# Altium PCB Big Coil Gate Drive PCBA.PcbDoc
Units mm, origin at the board's own origin, x right, y up, seen from the top; angles counter-clockwise.
Board outline 45.67 x 33.06 mm, 2 copper layers (Top Layer, Bottom Layer), stack 1.571 mm thick; 21 components, 10 nets, 60 pads, 0 vias.
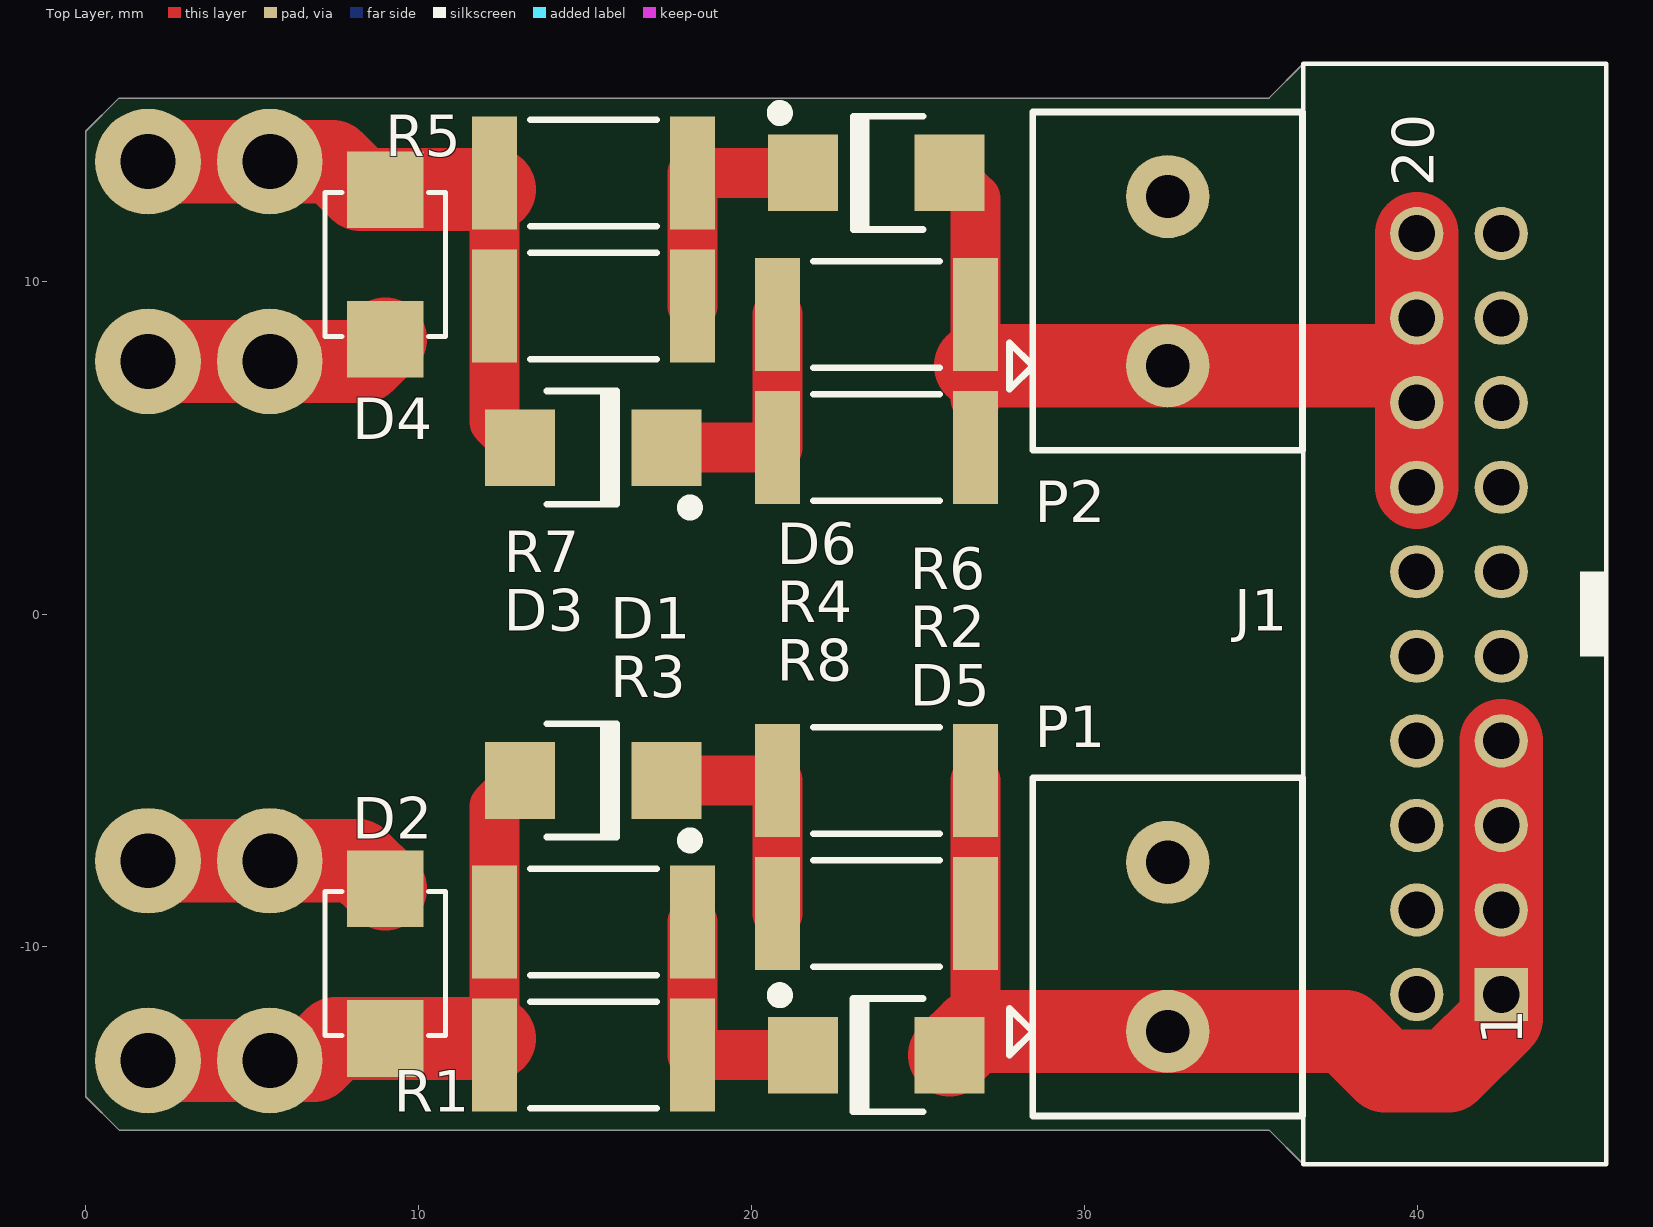
[diagram p0: Top Layer view]
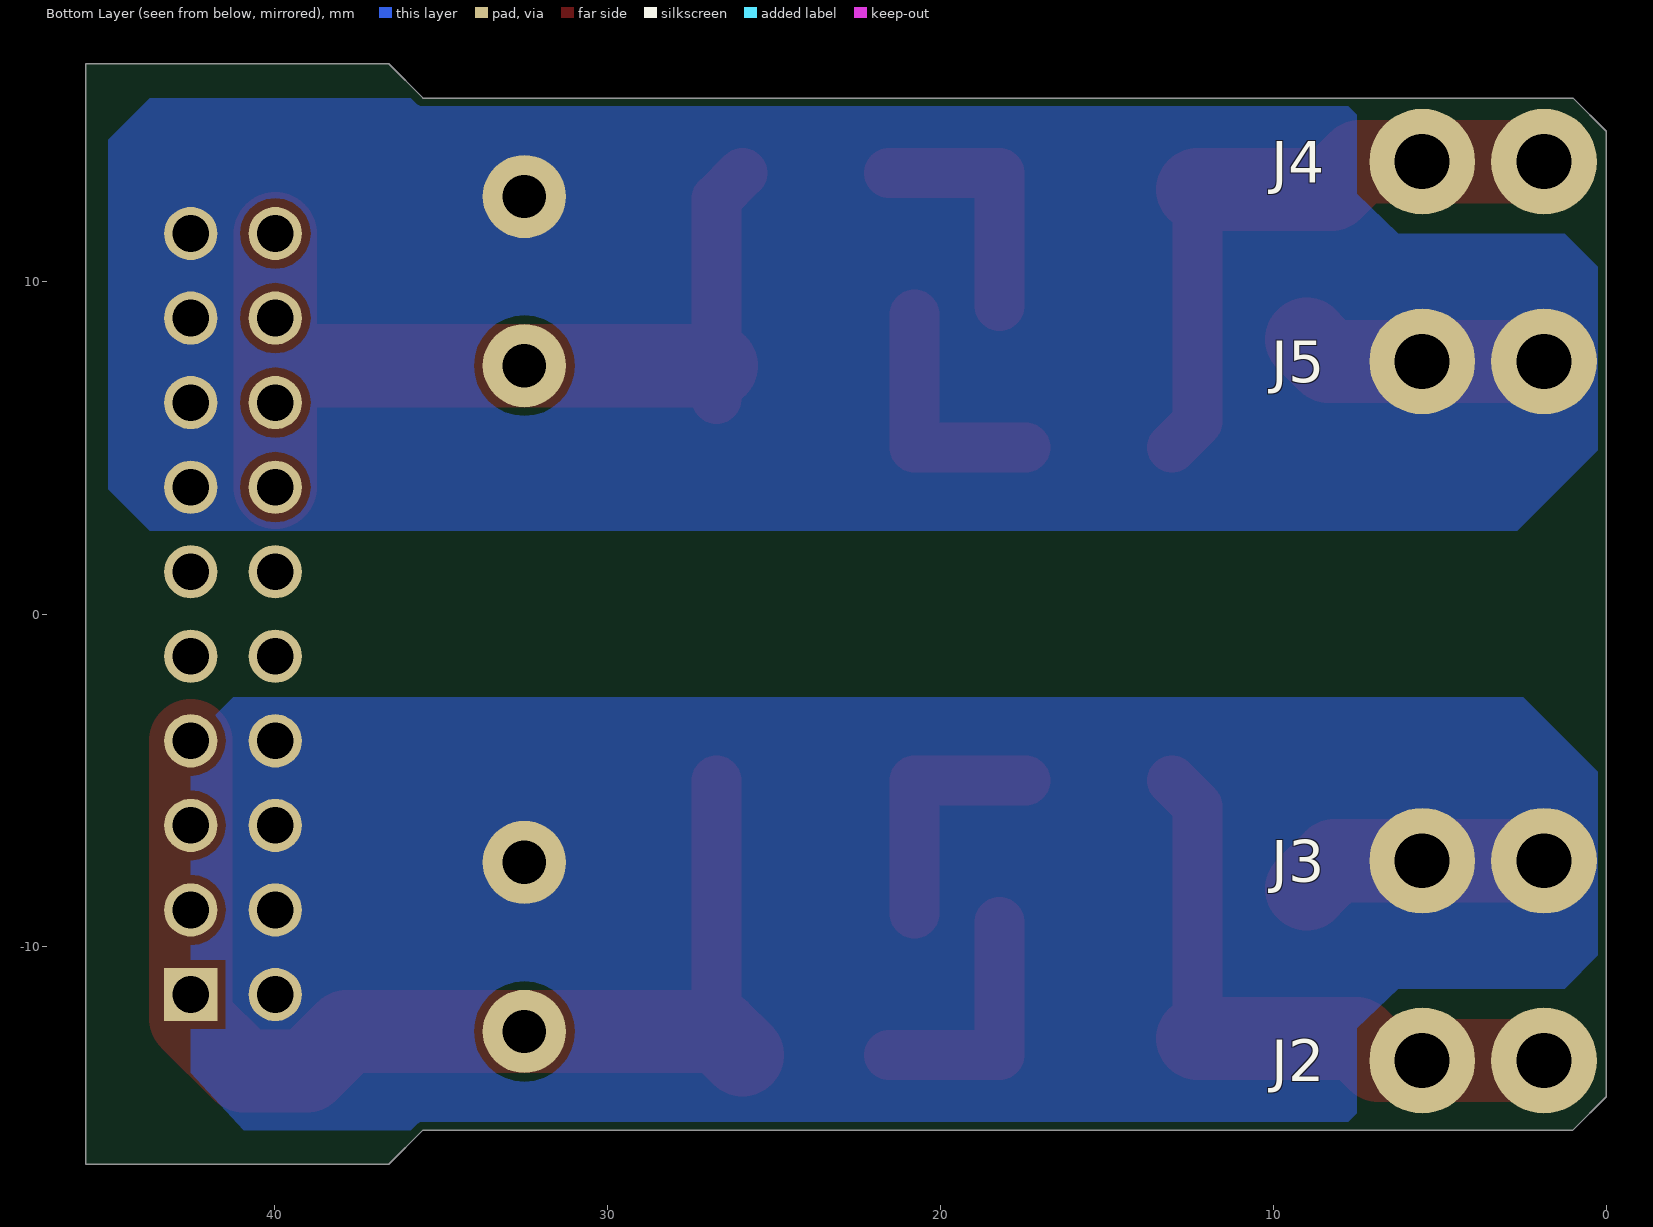
[diagram p1: Bottom Layer view, seen from below]
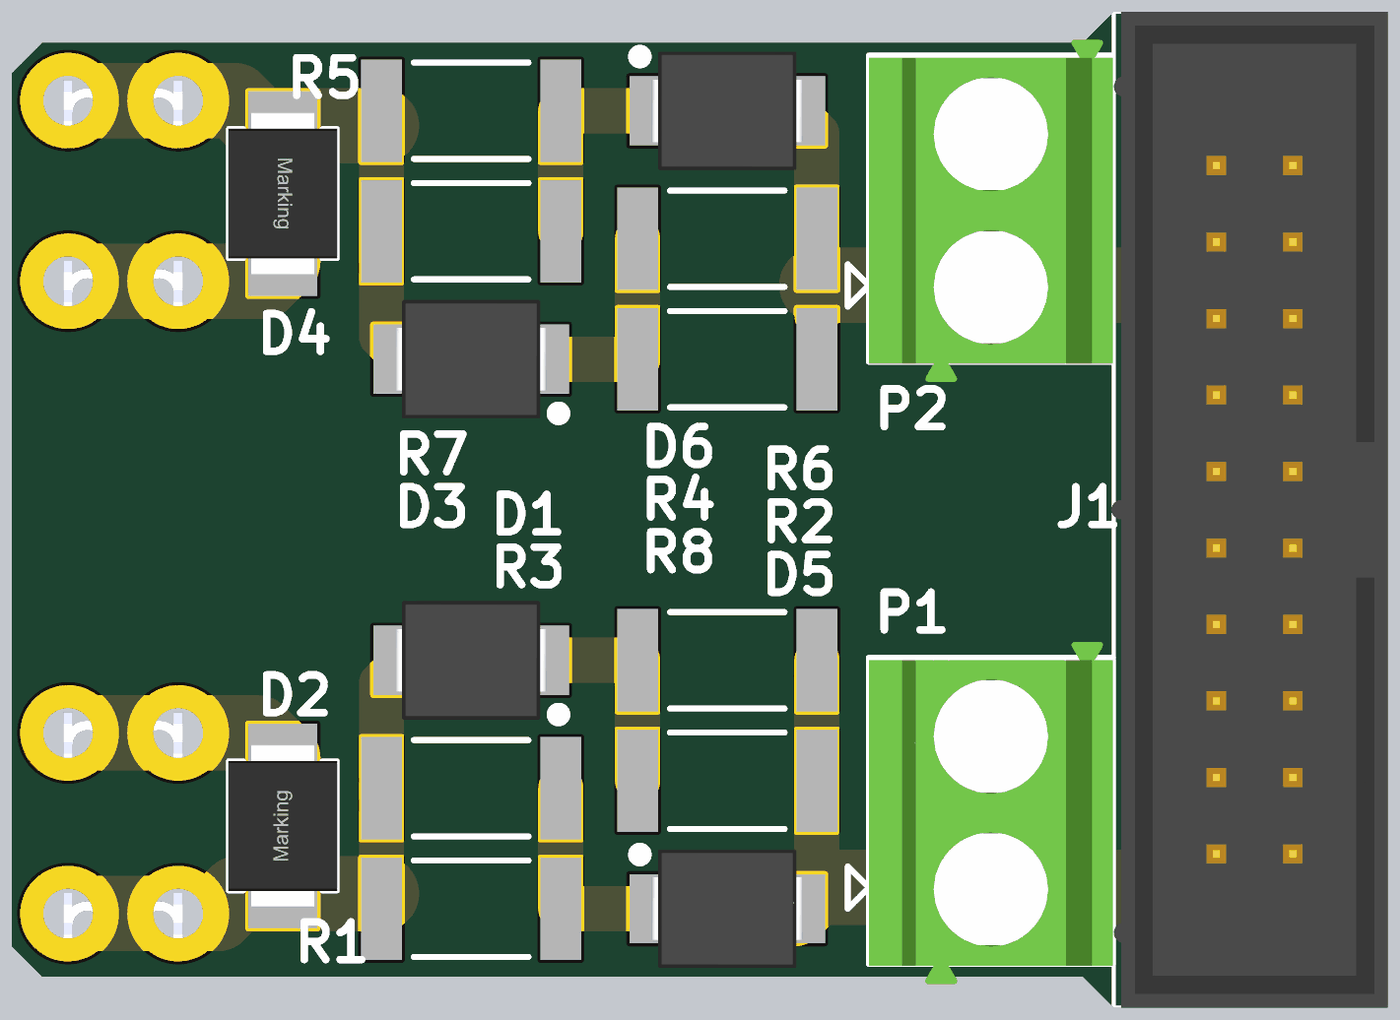
[diagram p2: 3D render of the assembled board from above, using the file's embedded part models]
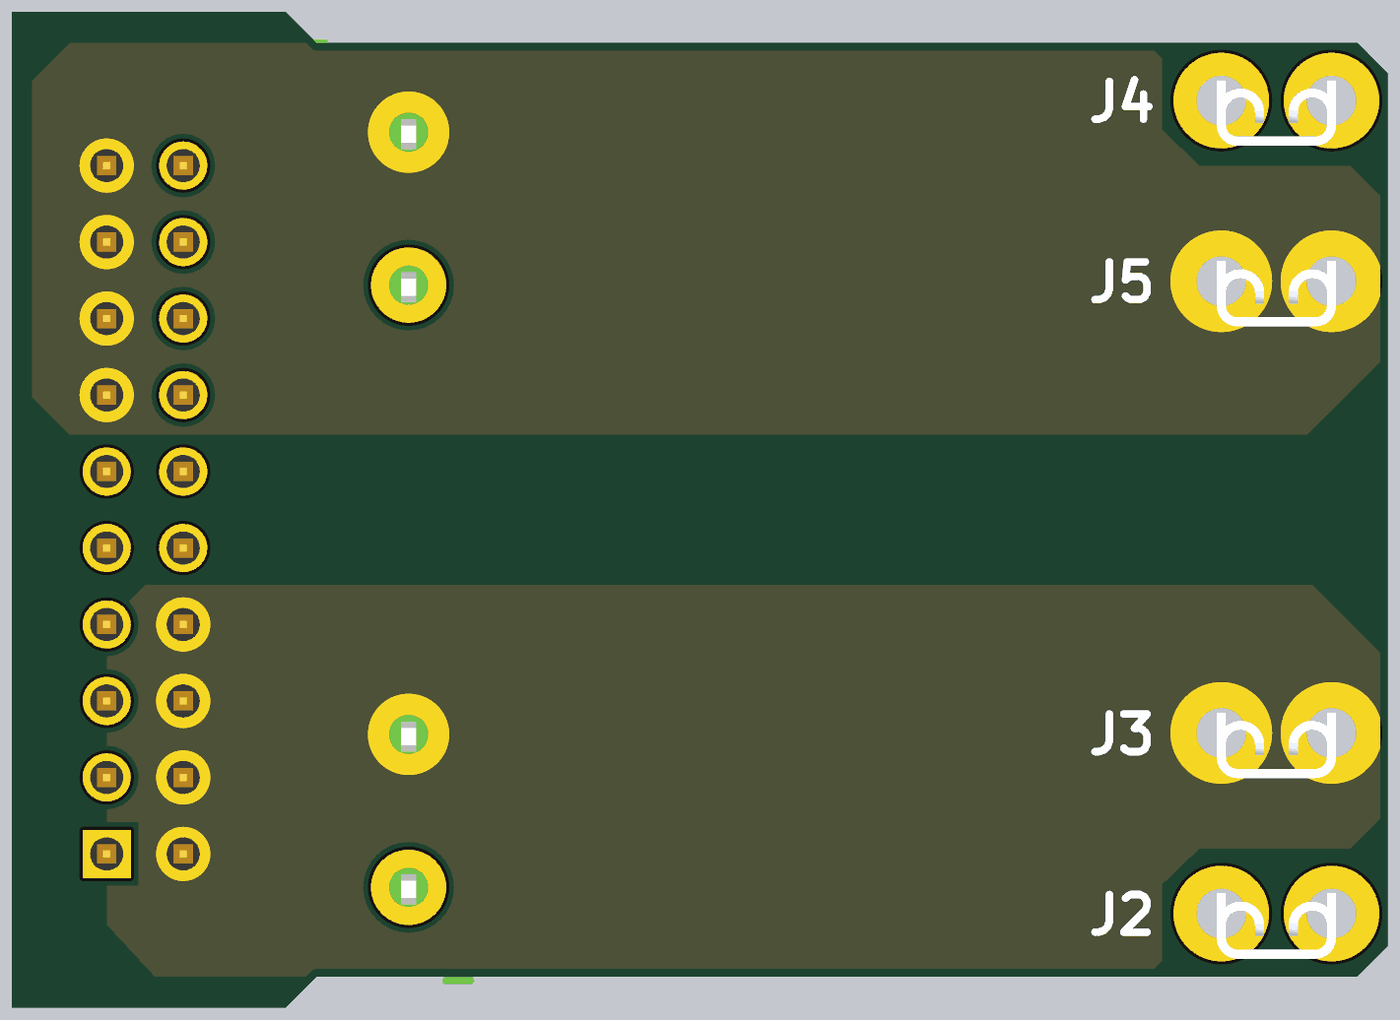
[diagram p3: 3D render of the assembled board from below, using the file's embedded part models]

## Layer stack, top to bottom
Top Solder: solder mask 0.0102, Solder Resist, Dk 3.5
Top Layer: signal copper 0.0356
Dielectric 1: dielectric 1.5, FR-4, Dk 4.8
Bottom Layer: signal copper 0.0356
Bottom Solder: solder mask 0.0102, Solder Resist, Dk 3.5

## Board outline
1,-15.5 0,-14.5 0,14.5 1,15.5 35.545,15.5 36.575,16.53 45.675,16.53 45.675,-16.53 36.575,-16.53 35.545,-15.5

## Design rules (kind name [scope] priority, off if disabled: settings)
BoardOutlineClearance [All] p1: gap=0.25 ignorepadtopadclearanceinfootprint=FALSE
Clearance [All] p1: gap=0.25 ignorepadtopadclearanceinfootprint=FALSE
ComponentClearance [All] p1 off: gap=0.254 collisioncheckmode=3 verticalgap=0.254 showdistances=FALSE
Height [All] p1 off: minheight=0 maxheight=25.4 prefheight=12.7
HoleSize [All] p1: absolutevalues=TRUE maxlimit=6.3 minlimit=0.025 maxpercent=80.000 minpercent=20.000
PolygonConnect [All] p1: connectstyle=Direct reliefconductorwidth=0.254 reliefentries=4 polygonreliefangle="90 Angle" airgapwidth=0.254
RoutingVias [All] p1: holewidth=0.5 width=1 viastyle="Through Hole" minholewidth=0.5 minwidth=1 maxholewidth=0.5 maxwidth=1
SolderMaskExpansion [All] p1: expansion=0.102
Width [All] p1: maxlimit=10 minlimit=0.25 preferedwidth=0.5
27 further rules are at their usual default settings.

## Components (designator, comment, footprint, x,y, rotation, side; value= is the part's Value field where it differs from the comment)
D1 "60V 2A" DO-214AA_(SMB-J-BEND)_UNI 15.25,-5 r180 top
D2 "600 W, 24 VDC" DO-214AA_Bidirectional 9,-10.5 r90 top
D3 "60V 2A" DO-214AA_(SMB-J-BEND)_UNI 15.25,5 r180 top
D4 "600 W, 24 VDC" DO-214AA_Bidirectional 9,10.5 r270 top
D5 "60V 2A" DO-214AA_(SMB-J-BEND)_UNI 23.75,-13.25 r0 top
D6 "60V 2A" DO-214AA_(SMB-J-BEND)_UNI 23.75,13.25 r0 top
J1 "61202021621" 61202021621 41.25,0 r90 top
J2 "Socket" KEYSTONE3534 3.7,-14.25 r270 bottom locked
J3 "Socket" KEYSTONE3534 3.7,-8.25 r270 bottom locked
J4 "Socket" KEYSTONE3534 3.7,12.75 r270 bottom locked
J5 "Socket" KEYSTONE3534 3.7,6.75 r270 bottom locked
P1 "Header 2" 691213510002 32.5,-10 r90 top
P2 "Header 2" 691213510002 32.5,10 r90 top
R1 "Res2" RES_2512 15.25,-13.25 r180 top value="5R6 1W"
R2 "Res2" RES_2512 23.75,-9 r180 top value="5R6 1W"
R3 "Res2" RES_2512 15.25,-9.25 r180 top value="5R6 1W"
R4 "Res2" RES_2512 23.75,9 r180 top value="5R6 1W"
R5 "Res2" RES_2512 15.25,13.25 r180 top value="5R6 1W"
R6 "Res2" RES_2512 23.75,-5 r180 top value="5R6 1W"
R7 "Res2" RES_2512 15.25,9.25 r180 top value="5R6 1W"
R8 "Res2" RES_2512 23.75,5 r180 top value="5R6 1W"

## Footprints (in the part's own frame and the unit in brackets; to place one, negate y for a bottom-side part, rotate by r counter-clockwise, add the part's x,y. Pads: shape width x height; smd on the part's side, far side on the other; paste and mask are expansions set on the pad)
61202021621 [mm] "20 pins, straight, gold plating"
  rect 1.6x1.6 hole 1.1: 1(-11.43,-1.27)
  round 1.6 hole 1.1: 2(-11.43,1.27) 3(-8.89,-1.27) 4(-8.89,1.27) 5(-6.35,-1.27) 6(-6.35,1.27) 7(-3.81,-1.27) 8(-3.81,1.27) 9(-1.27,-1.27) 10(-1.27,1.27) 11(1.27,-1.27) 12(1.27,1.27) 13(3.81,-1.27) 14(3.81,1.27) 15(6.35,-1.27) 16(6.35,1.27) 17(8.89,-1.27) 18(8.89,1.27) 19(11.43,-1.27) 20(11.43,1.27)
  silkscreen extent -16.53,-4.42 16.53,4.68, body extent -16.53,-4.42 16.53,4.75, height 9.13
691213510002 [mm]
  round 2.5 hole 1.3: 1(-2.54,0) 2(2.54,0)
  silkscreen extent -5.08,-4.05 5.08,4.75, body extent -5.75,-4.05 5.61,4.05, height 10
DO-214AA_(SMB-J-BEND)_UNI [mm] "Surface Mount Diode"
  rect 2.1x2.3 smd: A(2.2,0) K(-2.2,0)
  silkscreen extent -3.04,-1.7 1.4,1.94, body extent -2.51,-1.97 2.52,1.97, height 2.44
DO-214AA_Bidirectional [mm] "WE-TVSP Power TVS Diode, DO-214AA, Bidirectional"
  rect 2.3x2.3 smd: 1(-2.25,0) 2(2.25,0)
  silkscreen extent -2.16,-1.81 2.16,1.81, body extent -2.7,-1.81 2.7,1.81, height 2.4
KEYSTONE3534 [mil] "Keystone 3534 QC terminal"
  round 125 hole 65: 1(-33,-72) 1(-33,72)
  body extent -60,-78 26,78, height 316
RES_2512 [mm] "Chip Resistor 2512, 2-Leads, Body 6.40x3.20mm, IPC Medium Density"
  rect 1.35x3.4 smd: 1(-2.975,0) 2(2.975,0)
  silkscreen extent -1.9,-1.6 1.9,1.6, body extent -3.3,-1.7 3.3,1.7, height 0.7

## Part data
D1 D3 D5 D6: library part SS26, "SS26 Schottky rectifier"
D2 D4: library part "WE-TVSP DO-214AA, 824521241", "WE-TVSP Power TVS Diode, bidirectional, 600 W, 24 VDC", Manufacturer="Wurth Elektronik", partNo=824521241, ComponentLink1Description=Manufacturer, ComponentLink1URL=http://www.we-online.de, ComponentLink2Description=Datasheet, ComponentLink2URL=http://katalog.we-online.de/pbs/datasheet/824521241.pdf, Created by="Baojun Chen", Created Date=Nov.2015
J1: "WR-BHD 2.54mm Male Box Header", Manufacturer="Wurth Elektronik", ComponentLink1 Description=Manufacturer, ComponentLink1URL=http://www.we-online.com, ComponentLink2 Description=Datasheet, ComponentLink2URL=http://katalog.we-online.de/em/datasheet/6120xx21621.pdf, Created by="Baojun Chen", Created Date="March 2016", NoPins=20, partNo=61202021621
P1 P2: "Header, 2-Pin", LatestRevisionDate=17-Jul-2002, LatestRevisionNote="Re-released for DXP Platform.", Publisher="Altium Limited"
R1 R2 R3 R4 R5 R6 R7 R8: "Resistor", LatestRevisionDate=17-Jul-2002, LatestRevisionNote="Re-released for DXP Platform.", PackageDescription="Axial Device, Thru-Hole; 2 Leads; 0.4 in Pin Spacing", PackageReference=AXIAL-0.4, Published=8-Jun-2000, Publisher="Altium Limited"
J2 J3 J4 J5: LatestRevisionDate=17-Jul-2002, LatestRevisionNote="Re-released for DXP Platform.", Publisher="Altium Limited"

## Nets (pads, with @x,y where several pads share a name; then routed paths per layer and width w, separated by ;. In a path a pad name is that pad's centre, name@x,y a point inside that pad or via, vN(x,y) a via of type N, cw(c..) or ccw(c..) an arc to the next point about the centre after c; other vN are vias at no path point)
E1C2: D2.2 J1.2 J1.4 J1.6 J1.8 J3.1 P1.2 | length 7.5
  Top Layer w2.5: J3.1@1.871,-7.412 5.529,-7.412 8.162,-7.412 D2.2
HIGH_G: D5.A J1.1 J1.3 J1.5 J1.7 P1.1 R2.1 R6.1 | length 32.9
  Top Layer w1.5: 26.725,-11.54 R2.1 R6.1
  Top Layer w2.5: D5.A 26.66,-12.54 P1.1 37.837,-12.54 39.027,-13.73 40.933,-13.73 42.52,-12.143 J1.1 J1.3 J1.5 J1.7
LOW_G: D6.A J1.14 J1.16 J1.18 J1.20 P2.1 R4.1 R8.1 | length 28
  Top Layer w1.5: D6.A 26.725,12.475 R8.1@26.725,6.46
  Top Layer w2.5: R4.1@26.725,7.46 P2.1 39.98,7.46 ; J1.14 J1.16 39.98,7.21 J1.18 J1.20
NetD1_A: D1.A D2.1 J2.1 R1.2 R3.2 | length 19.2
  Top Layer w1.5: R1.2 12.275,-12.75 12.275,-11.2 R3.2 12.275,-5.775 D1.A
  Top Layer w2.5: J2.1@1.871,-13.412 5.529,-13.412 6.838,-13.412 7.5,-12.75 D2.1 R1.2@12.275,-12.75
NetD1_K: D1.K R2.2 R6.2 | length 7.3
  Top Layer w1.5: D1.K R6.2 R2.2
NetD3_A: D3.A D4.1 J4.1 R5.2 R7.2 | length 18.6
  Top Layer w1.5: R5.2@12.275,12 12.275,11.2 12.275,5.775 D3.A ; R5.2@12.275,12.75 R5.2
  Top Layer w2.5: J4.1@1.871,13.588 5.529,13.588 7.412,13.588 8.25,12.75 D4.1 R5.2@12.275,12.75
NetD3_K: D3.K R4.2 R8.2 | length 7.3
  Top Layer w1.5: D3.K R8.2 R4.2
NetD5_K: D5.K R1.1 R3.1 | length 7.3
  Top Layer w1.5: R3.1 R1.1 D5.K
NetD6_K: D6.K R5.1 R7.1 | length 7.3
  Top Layer w1.5: R7.1 R5.1 D6.K
VBus-: D4.2 J1.13 J1.15 J1.17 J1.19 J5.1 P2.2 | length 7.4
  Top Layer w2.5: J5.1@1.871,7.588 5.529,7.588 8.338,7.588 D4.2
pads on no net: J1.9 J1.10 J1.11 J1.12

## Polygon pours and split planes (outlines as drawn)
VBus- on Bottom Layer "VBUS-_L02_P019" (solid, pour order 19): 0,10.176 1.25,11.426 6.25,11.426 7.5,12.626 7.5,15 8,15.5 43.75,15.5 45,14.25 45,3.75 43.75,2.5 38.719,2.5 2.676,2.5 0,5.176
E1C2 on Bottom Layer "E1C2_L02_P017" (solid, pour order 17): 0,-10 1.25,-11.25 6.25,-11.25 7.5,-12.45 7.5,-15 8,-15.5 40.926,-15.5 42.52,-13.778 42.52,-3.77 41.25,-2.5 38.75,-2.5 2.5,-2.5 0,-5

## Silkscreen, mask and mechanical layers (free items; w line width, h text height)
Mechanical 1:
  lines w0.2: 3,-16.25 cw(c3,-14.25) 3,-12.25 6.5,-12.25 cw(c6.5,-14.25) 6.5,-16.25 3,-16.25 ; 3,-10.25 cw(c3,-8.25) 3,-6.25 6.5,-6.25 cw(c6.5,-8.25) 6.5,-10.25 3,-10.25 ; 3,4.75 cw(c3,6.75) 3,8.75 6.5,8.75 cw(c6.5,6.75) 6.5,4.75 3,4.75 ; 3,10.75 cw(c3,12.75) 3,14.75 6.5,14.75 cw(c6.5,12.75) 6.5,10.75 3,10.75
  lines w0.508: 2.6,-14.25 6.9,-14.25 ; 2.6,-8.25 6.9,-8.25 ; 2.6,6.75 6.9,6.75 ; 2.6,12.75 6.9,12.75
Board Outline:
  the board outline again, w0.254

## Text inside footprints (layer, text, board x,y; h text height)
J1: Top Overlay "1" at 43.155,-12.954 h1.25 r90; Top Overlay "20" at 40.488,12.827 h1.25 r90
P1: Mechanical 9 "Cable Entry / Side" at 36.55,-14.25 h1.25 r90
P2: Mechanical 9 "Cable Entry / Side" at 36.55,5.75 h1.25 r90